# Altium PCB RPL_24V_2.PcbDoc
Units mil, origin at the board's own origin, x right, y up, seen from the top; angles counter-clockwise.
Board outline 3240 x 1760 mil, 2 copper layers (Top Layer, Bottom Layer); 20 components, 13 nets, 55 pads, 44 vias.
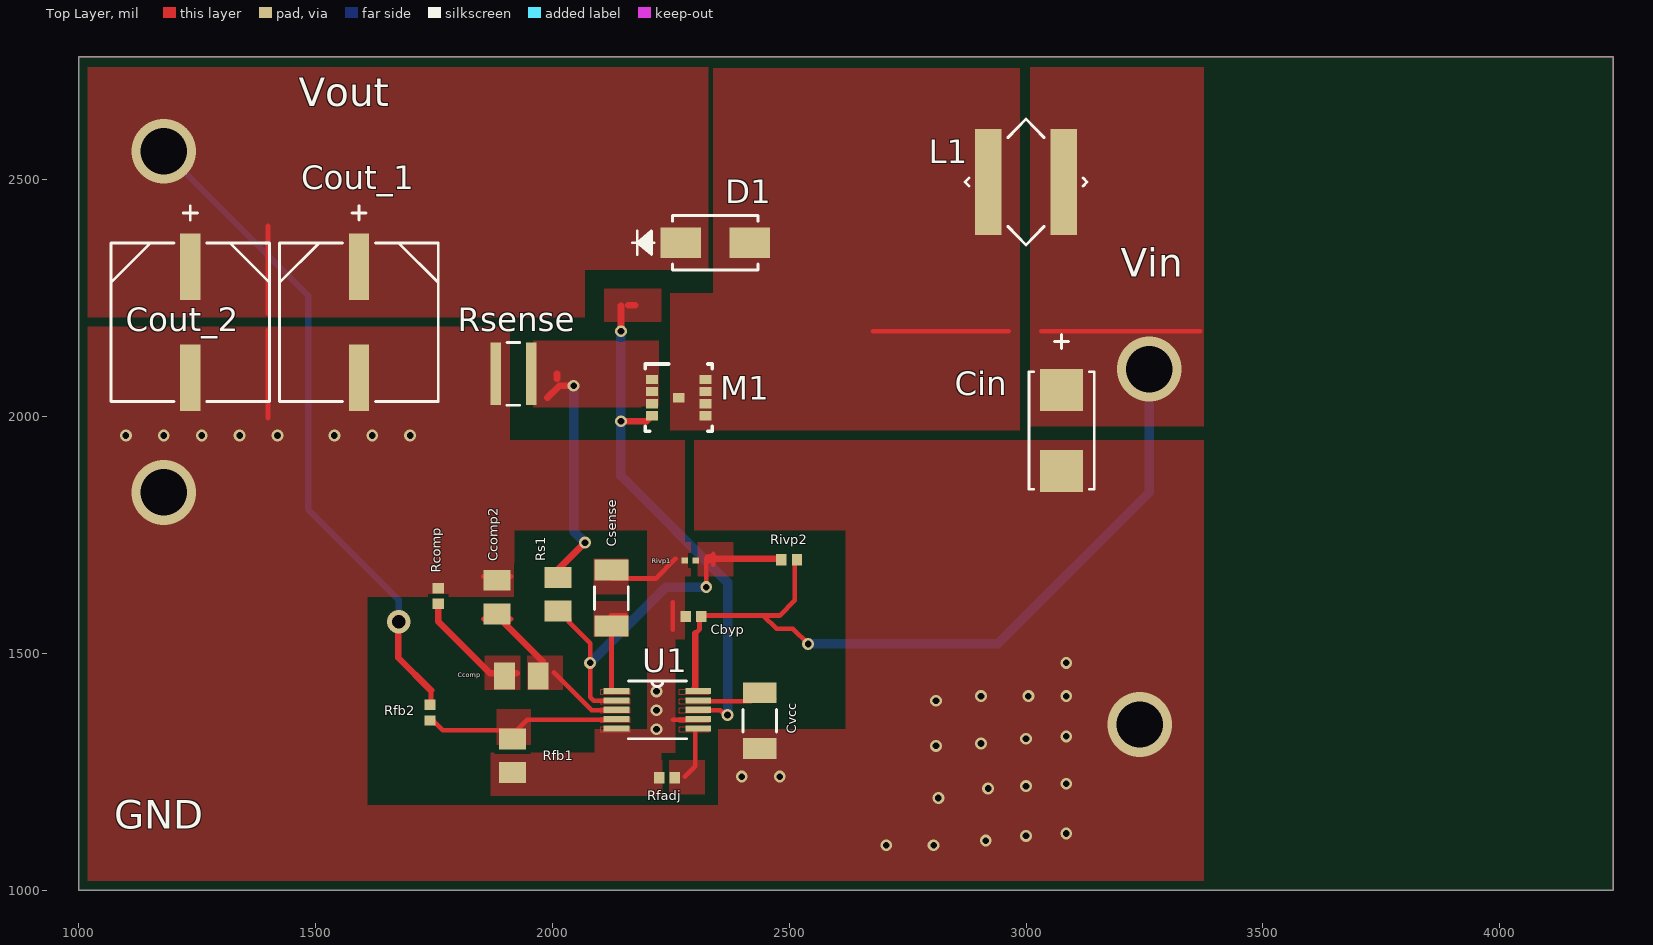
[diagram p0: Top Layer view]
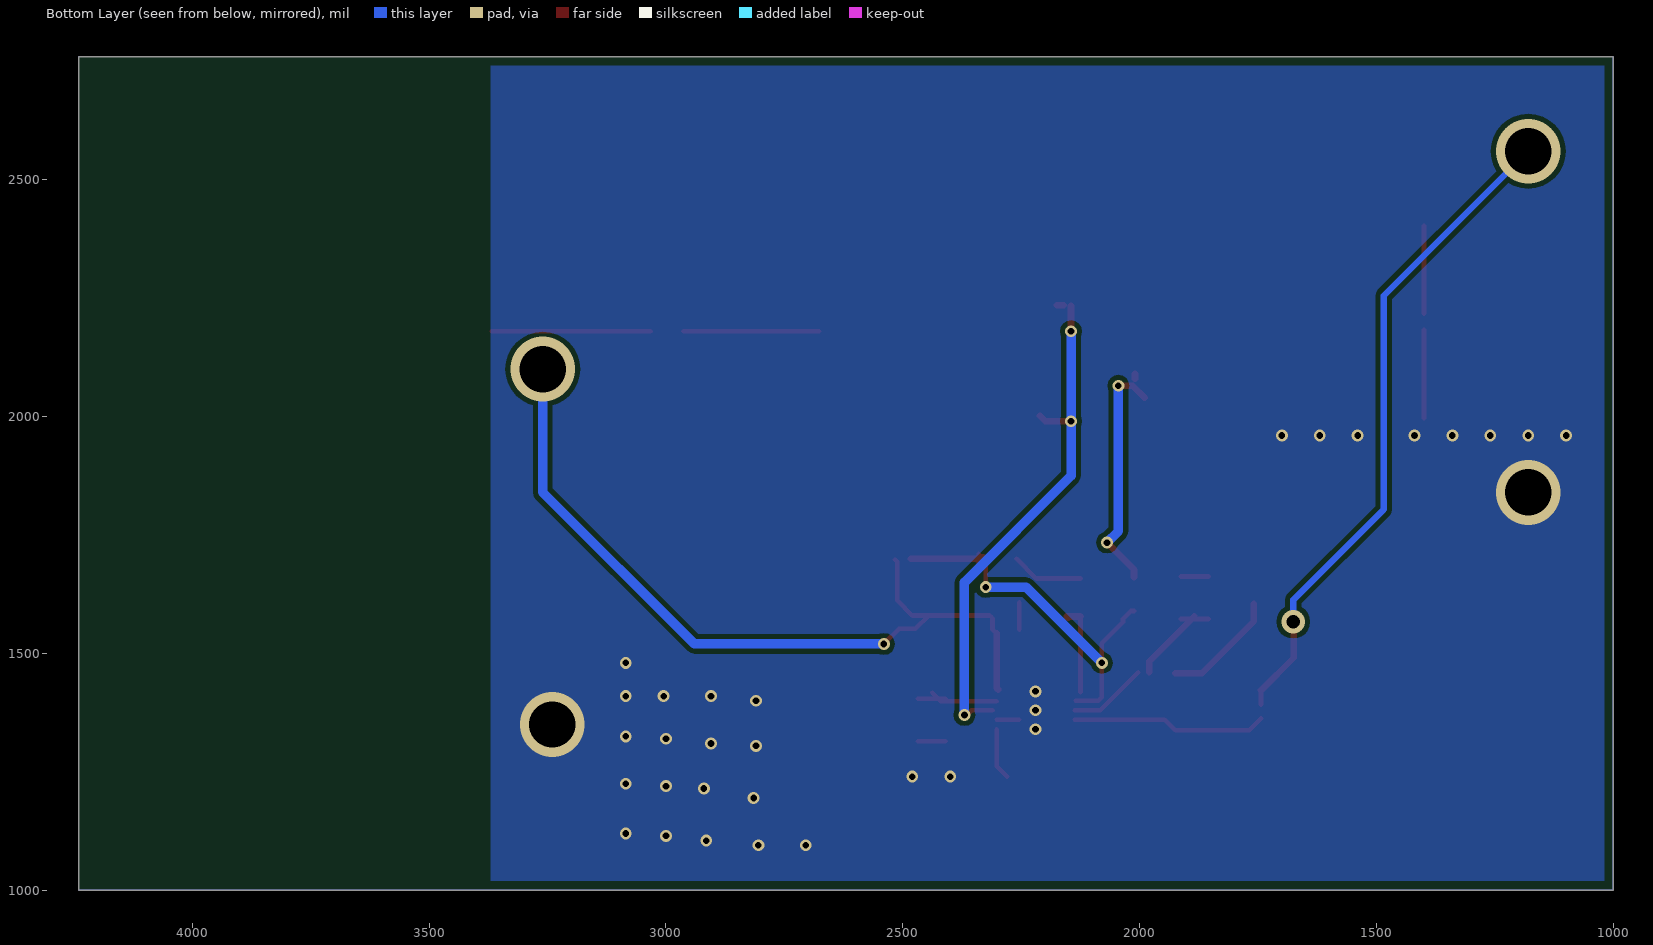
[diagram p1: Bottom Layer view, seen from below]

## Layer stack, top to bottom
Top Solder: solder mask 0.4, Solder Resist, Dk 3.5
Top Layer: signal copper 1.4
Dielectric2: prepreg 12.6, FR-4, Dk 4.8
Bottom Layer: signal copper 1.4
Bottom Solder: solder mask 0.4, Solder Resist, Dk 3.5

## Board outline
1000,1000 4240,1000 4240,2760 1000,2760

## Design rules (kind name [scope] priority, off if disabled: settings)
Clearance [All] p1: gap=5 ignorepadtopadclearanceinfootprint=FALSE
MinimumSolderMaskSliver [All] p1: minsoldermaskwidth=1
PlaneConnect [All] p1: planeconnectstyle=Direct reliefexpansion=20 reliefentries=4 reliefconductorwidth=10 reliefairgap=10
PolygonConnect [All] p1: connectstyle=Direct reliefconductorwidth=10 reliefentries=4 polygonreliefangle="90 Angle" airgapwidth=10
RoutingVias [All] p1: holewidth=28 width=50 viastyle="Through Hole" minholewidth=28 minwidth=50 maxholewidth=28 maxwidth=50
SolderMaskExpansion [All] p1: expansion=4
Width [All] p1: maxlimit=100 minlimit=10 preferedwidth=10
28 further rules are at their usual default settings.

## Components (designator, comment, footprint, x,y, rotation, side; value= is the part's Value field where it differs from the comment)
Cbyp "Comment" 0402 2298,1578 r180 top
Ccomp "Comment" 0805 1935,1452 r180 top
Ccomp2 "Comment" 0805 1883,1619 r90 top
Cin "Comment" 6032-28 3075,1970.5 r270 top
Cout_1 "Comment" CAPSMT_62_E12 1592,2199 r270 top
Cout_2 "Comment" CAPSMT_62_E12 1236,2199 r270 top
Csense "Comment" 1206 2125,1617 r90 top
Cvcc "Comment" 1206 2438,1358 r270 top
D1 "Comment" SMA 2344,2367 r0 top
L1 "Comment" XAL6060 3000,2495 r180 top
M1 "Comment" DQG0008A 2267,2040 r0 top
Rcomp "Comment" 0402 1759,1621 r90 top
Rfadj "Comment" 0402 2242,1238 r0 top
Rfb1 "Comment" 0805 1916,1284 r270 top
Rfb2 "Comment" 0402 1742,1375 r270 top
Rivp1 "Comment" 0201 2291,1696 r180 top
Rivp2 "Comment" 0402 2500,1698 r180 top
Rs1 "Comment" 0805 2012,1625 r270 top
Rsense "Comment" 0612 1918,2090 r0 top
U1 "Comment" MUB10A 2222,1381 r0 top

## Footprints (in the part's own frame and the unit in brackets; to place one, negate y for a bottom-side part, rotate by r counter-clockwise, add the part's x,y. Pads: shape width x height; smd on the part's side, far side on the other; paste and mask are expansions set on the pad)
0201 [mil]
  rect 14x13 smd: 1(-11.5,0) 2(11.5,0)
0402 [mil]
  rect 22x24 smd: 1(-16.5,0) 2(16.5,0)
0612 [mil]
  rect 22x132 smd: 1(-37.5,0) 2(37.5,0)
  silkscreen extent -13,-66 13,66
0805 [mil]
  rect 44x57 smd: 1(-35.5,0) 2(35.5,0)
1206 [mil]
  rect 44x71 smd: 1(-59,0) 2(59,0)
  silkscreen extent -24,-36 24,36
6032-28 [mil]
  rect 89x91 smd: 1(-85.5,0) 2(85.5,0)
  silkscreen extent -203,-69 124,69
CAPSMT_62_E12 [mil]
  rect 140x43 smd: 1(-117,0) 2(117,0)
  silkscreen extent -246,-168 168,168
DQG0008A [mm]
  rect 0.63x0.5 smd: 1(-1.435,0.975) 2(-1.435,0.325) 3(-1.435,-0.325) 4(-1.435,-0.975) 5(1.435,-0.975) 6(1.435,-0.325) 7(1.435,0.325) 8(1.435,0.975) 9(0,0)
  silkscreen extent -1.8,-1.8 1.8,1.8
MUB10A [mil]
  rect 54x13 smd: 1(-86.5,39.37) 2(-86.5,19.68) 3(-86.5,0) 4(-86.5,-19.68) 5(-86.5,-39.37) 6(86.5,-39.37) 7(86.5,-19.68) 8(86.5,0) 9(86.5,19.68) 10(86.5,39.37)
  silkscreen extent -61,-61 61,61
SMA [mil]
  rect 86x64 smd: 1(-73,0) 2(73,0)
  silkscreen extent -174,-58 90,58
XAL6060 [mil]
  rect 56x224 smd: 1(-79.5,0) 2(79.5,0)
  silkscreen extent -129,-133 129,133

## Via types
v1: diameter 25/25 (per signal layer), hole 14, Top Layer to Bottom Layer, 39 vias
v2: diameter 137/137 (per signal layer), hole 98, Top Layer to Bottom Layer, 4 vias
v3: diameter 50/50 (per signal layer), hole 28, Top Layer to Bottom Layer, 1 vias

## Nets (pads, with @x,y where several pads share a name; then routed paths per layer and width w, separated by ;. In a path a pad name is that pad's centre, name@x,y a point inside that pad or via, vN(x,y) a via of type N, cw(c..) or ccw(c..) an arc to the next point about the centre after c; other vN are vias at no path point)
0: Cbyp.2 Ccomp2.2 Cin.2 Cout_1.2 Cout_2.2 Csense.2 Cvcc.2 Rcomp.2 Rfadj.1 Rfb1.2 Rivp1.2 Rsense.1 U1.5 U1.7 | length 559.4
  Top Layer w10: 1400,1997 1400,2183 ; Ccomp2.2@1855,1662.5 1913,1662.5 ; Csense.2@2125,1658 2218,1658 2260,1700 ; 2254.5,1550 2254.5,1608 ; 2255,1360 U1.7@2302,1360 ; Cvcc.2@2410,1314.5 Cvcc.2@2468,1314.5
  other v1: 2705,1095 2805,1095 2915,1105 3000,1115 3085,1120 2815,1195 2920,1215 3000,1220 3085,1225 2400,1240 2480,1240 2810,1305 2905,1310 3000,1320 3085,1325 2220,1340 2220,1380 2810,1400 2905,1410 3005,1410 3085,1410 2220,1420 3085,1480 1100,1960 1180,1960 1260,1960 1340,1960 1420,1960 1540,1960 1620,1960 1700,1960
  other v2: 3240,1350 1180,1840
1: Cbyp.1 Cin.1 L1.1 Rivp2.1 U1.10 | length 2027.9
  Top Layer w10: 2302,1542 2311,1551 2311,1574.5 Cbyp.1 2316.5,1580 2445.38,1580 ; Rivp2.1 2512,1693.5 2512,1612 2480,1580 2445.38,1580 ; v1(2540,1520) 2508,1552 2473.38,1552 2445.38,1580 ; 3032,2180 3368,2180
  Top Layer w14: U1.10@2299,1424 2302,1427 2302,1542
  Bottom Layer w20: v1(2540,1520) 2940,1520 3260,1840 v2(3260,2100)
2: Cvcc.1 U1.9 | length 201.5
  Top Layer w10: U1.9@2302,1399 2420,1399 Cvcc.1@2425.5,1404.5 ; Cvcc.1@2410,1404.5 Cvcc.1@2425.5,1404.5 ; Cvcc.1 Cvcc.1@2425.5,1404.5 ; Cvcc.1@2468,1404.5 Cvcc.1@2425.5,1404.5
3: Csense.1 U1.1 | length 193.2
  Top Layer w10: U1.1@2125,1418 Csense.1 Csense.1@2125,1578
  Top Layer w14: Csense.1@2125,1578 2154,1578 Csense.1@2151,1575
4: D1.2 L1.2 M1.5 M1.6 M1.7 M1.8 M1.9 | length 286
  Top Layer w10: 2677,2180 2923.5,2180 2963,2180
5: Rivp1.1 Rivp2.2 Rs1.2 U1.2 | length 814.6
  Top Layer w10: Rs1.2 2018.5,1589.5 2035.5,1572.5 2035.5,1566 2080,1521.5 v1(2080,1480) 2080,1408 2088,1400 U1.2@2135,1400 ; v1(2325,1640) 2325,1695 ; 2340,1687 2340,1700 2340,1710
  Top Layer w14: 2340,1700 Rivp2.2@2483.5,1700
  Top Layer w20: 2330,1700 2340,1700
  Bottom Layer w20: v1(2080,1480) 2240,1640 v1(2325,1640)
6: Ccomp2.1 Ccomp.1 U1.3 | length 382.5
  Top Layer w10: Ccomp2.1@1855,1572.5 1913,1572.5 ; 2003,1460 2083,1380 U1.3@2137,1380
  Top Layer w14: Ccomp2.1@1885,1578 1980,1483 Ccomp.1@1980,1460
7: M1.1 M1.2 M1.3 Rs1.1 Rsense.2 | length 513.4
  Top Layer w14: 1990,2040 2015,2065 v1(2045,2065) ; 2010,2080 2010,2090 ; Rs1.1 2012,1677 v1(2069,1734)
  Bottom Layer w20: v1(2045,2065) 2045,1758 v1(2069,1734)
8: Cout_1.1 Cout_2.1 D1.1 Rfb2.1 | length 1595
  Top Layer w10: 1400,2217 1400,2403 ; Rfb2.1@1744,1392 1744,1422
  Top Layer w14: v3@1675,1570 v3@1675,1567 ; v3(1676,1567) v3@1675,1567 ; 1744,1422 1675,1491 v3@1675,1567
  Bottom Layer w14: v2(1180,2560) 1485,2255 1485,1804 1676,1613 v3(1676,1567) v3@1679,1567
9: Rfb1.1 Rfb2.2 U1.4 | length 412.5
  Top Layer w10: Rfb2.2@1744,1363 1769,1338 1925,1338 1947,1360 U1.4@2137,1360
10: M1.4 U1.8 | length 1101.7
  Top Layer w10: U1.8@2310,1380 2355,1380 2365,1370 v1(2370,1370)
  Top Layer w14: v1(2145,2180) 2145,2234 ; v1@2150,1990 2198.89,1990 M1.4 ; 2160,2235 2175,2235
  Bottom Layer w20: v1(2145,2180) v1(2145,1990) 2145,1875 2370,1650 v1(2370,1370)
11: Rfadj.2 U1.6 | length 109.1
  Top Layer w10: 2280,1240 2302,1262 U1.6@2302,1340
12: Ccomp.2 Rcomp.1 | length 248.1
  Top Layer w14: Rcomp.1 1759,1568 1869,1458 1925,1458

## Polygon pours and split planes (outlines as drawn)
no net on Top Solder "Top Layer-No Net" (solid, remove dead copper): 2244.95,2090.23 2319.76,2090.23 2320.15,2090.19 2320.52,2090.08 2320.87,2089.89 2321.17,2089.64 2321.42,2089.34 2321.6,2088.99 2321.72,2088.62 2321.76,2088.23 2321.76,1991.77 2321.72,1991.38 2321.6,1991.01 2321.42,1990.66 2321.17,1990.36 2320.87,1990.11 2320.52,1989.92 2320.15,1989.81 2319.76,1989.77 2244.95,1989.77 2244.56,1989.81 2244.19,1989.92 2243.84,1990.11 2243.54,1990.36 2243.29,1990.66 2243.1,1991.01 2242.99,1991.38 2242.95,1991.77 2242.95,2088.23 2242.99,2088.62 2243.1,2088.99 2243.29,2089.34 2243.54,2089.64 2243.84,2089.89 2244.19,2090.08 2244.56,2090.19
no net on Top Paste "Top Layer-No Net" (solid, remove dead copper): 2248.89,2080.16 2305.78,2080.16 2305.78,2044.92 2248.89,2044.92
no net on Top Paste "Top Layer-No Net" (solid, remove dead copper): 2248.89,2035.08 2248.89,1999.84 2305.78,1999.84 2305.78,2035.08
no net on Top Paste "Top Layer-No Net" (solid, remove dead copper): 2201.65,2085.08 2219.36,2085.08 2219.36,2071.69 2201.65,2071.69
no net on Top Paste "Top Layer-No Net" (solid, remove dead copper): 2201.65,2059.49 2219.36,2059.49 2219.36,2046.1 2201.65,2046.1
no net on Top Paste "Top Layer-No Net" (solid, remove dead copper): 2201.65,2033.9 2219.36,2033.9 2219.36,2020.51 2201.65,2020.51
no net on Top Paste "Top Layer-No Net" (solid, remove dead copper): 2201.65,2008.31 2219.36,2008.31 2219.36,1994.92 2201.65,1994.92
no net on Top Paste "Top Layer-No Net" (solid, remove dead copper): 2314.64,2008.31 2332.35,2008.31 2332.35,1994.92 2314.64,1994.92
no net on Top Paste "Top Layer-No Net" (solid, remove dead copper): 2314.64,2033.9 2332.35,2033.9 2332.35,2020.51 2314.64,2020.51
no net on Top Paste "Top Layer-No Net" (solid, remove dead copper): 2314.64,2059.49 2332.35,2059.49 2332.35,2046.1 2314.64,2046.1
no net on Top Paste "Top Layer-No Net" (solid, remove dead copper): 2314.64,2085.08 2332.35,2085.08 2332.35,2071.69 2314.64,2071.69
no net on Top Overlay "Top Layer-No Net" (solid, remove dead copper): 2355.5,1427.87 2355.5,1412.87 2345.5,1412.87 2345.5,1427.87
0 on Top Layer "Top Layer-No Net" (solid, pour order 28): 1020,2190 1910,2190 1910,1950 2280,1950 2280,1530 2260,1530 2260,1290 2230,1290 2230,1200 1870,1200 1870,1290 2090,1290 2090,1340 2200,1340 2200,1760 1920,1760 1919,1620 1610,1620 1610,1180 2350,1180 2350,1340 2620,1340 2620,1760 2300,1760 2300,1950 3375,1950 3375,1020 1020,1020
5 on Top Layer "Top Layer-No Net" (solid, pour order 0): 2307,1663 2307,1735 2382,1735 2382,1663
11 on Top Layer "Top Layer-No Net" (solid, pour order 1): 2268,1334 2268,1345 2330,1345 2330,1334
10 on Top Layer "Top Layer-No Net" (solid, pour order 2): 2268,1374 2268,1385 2330,1385 2330,1374
2 on Top Layer "Top Layer-No Net" (solid, pour order 3): 2268,1393 2268,1404 2330,1404 2330,1393
1 on Top Layer "Top Layer-No Net" (solid, pour order 4): 2268,1413 2268,1424 2330,1424 2330,1413
9 on Top Layer "Top Layer-No Net" (solid, pour order 5): 2102,1354 2102,1365 2164,1365 2164,1354
6 on Top Layer "Top Layer-No Net" (solid, pour order 6): 2102,1374 2102,1385 2164,1385 2164,1374
5 on Top Layer "Top Layer-No Net" (solid, pour order 7): 2102,1393 2102,1404 2164,1404 2164,1393
3 on Top Layer "Top Layer-No Net" (solid, pour order 8): 2102,1413 2102,1424 2164,1424 2164,1413
9 on Top Layer "Top Layer-No Net" (solid, pour order 9): 1883,1307 1883,1382 1955,1382 1955,1307
11 on Top Layer "Top Layer-No Net" (solid, pour order 10): 2247,1203 2247,1275 2322,1275 2322,1203
6 on Top Layer "Top Layer-No Net" (solid, pour order 11): 1947,1423 1947,1495 2022,1495 2022,1423
12 on Top Layer "Top Layer-No Net" (solid, pour order 12): 1857,1423 1857,1495 1932,1495 1932,1423
3 on Top Layer "Top Layer-No Net" (solid, pour order 13): 2088,1535 2088,1610 2160,1610 2160,1535
4 on Top Layer "Top Layer-No Net" (solid, pour order 14): 2340,2735 2987,2735 2987,1971 2249,1971 2249,2260 2340,2260
10 on Top Layer "Top Layer-No Net" (solid, pour order 15): 2110,2270 2230,2270 2230,2200 2110,2200
1 on Top Layer "Top Layer-No Net" (solid, pour order 16): 3009,2667 3009,2737 3375,2737 3375,2191 3375,2179 3375,1980 3009,1980
8 on Top Layer "Top Layer-No Net" (solid, pour order 17): 1020,2210 2069,2210 2069,2310 2329,2310 2329,2737 1020,2737
7 on Top Layer "Top Layer-No Net" (solid, pour order 18): 1960,2160 1960,2020 2225,2020 2225,2160
0 on Top Layer "Top Layer-No Net" (solid, pour order 19): 2217,1663 2217,1735 2292,1735 2292,1663
0 on Top Layer "Top Layer-No Net" (solid, pour order 20): 2268,1354 2268,1365 2330,1365 2330,1354
0 on Top Layer "Top Layer-No Net" (solid, pour order 21): 2102,1334 2102,1345 2164,1345 2164,1334
0 on Top Layer "Top Layer-No Net" (solid, pour order 22): 1883,1217 1883,1292 1955,1292 1955,1217
0 on Top Layer "Top Layer-No Net" (solid, pour order 23): 2157,1203 2157,1275 2232,1275 2232,1203
0 on Top Layer "Top Layer-No Net" (solid, pour order 24): 2088,1625 2088,1700 2160,1700 2160,1625
0 on Bottom Layer "Top Layer-No Net" (solid, pour order 25): 1020,1020 3370,1020 3370,2740 1020,2740

## Other copper
Multi-Layer:
  the board outline again, w1

## Silkscreen, mask and mechanical layers (free items; w line width, h text height)
Top Overlay:
  text "Vout" at 1465,2655 h60
  text "Vin" at 3200,2295 h60
  text "GND" at 1075,1130 h60